# EAGLE board kbang_new (EAGLE 5.10)
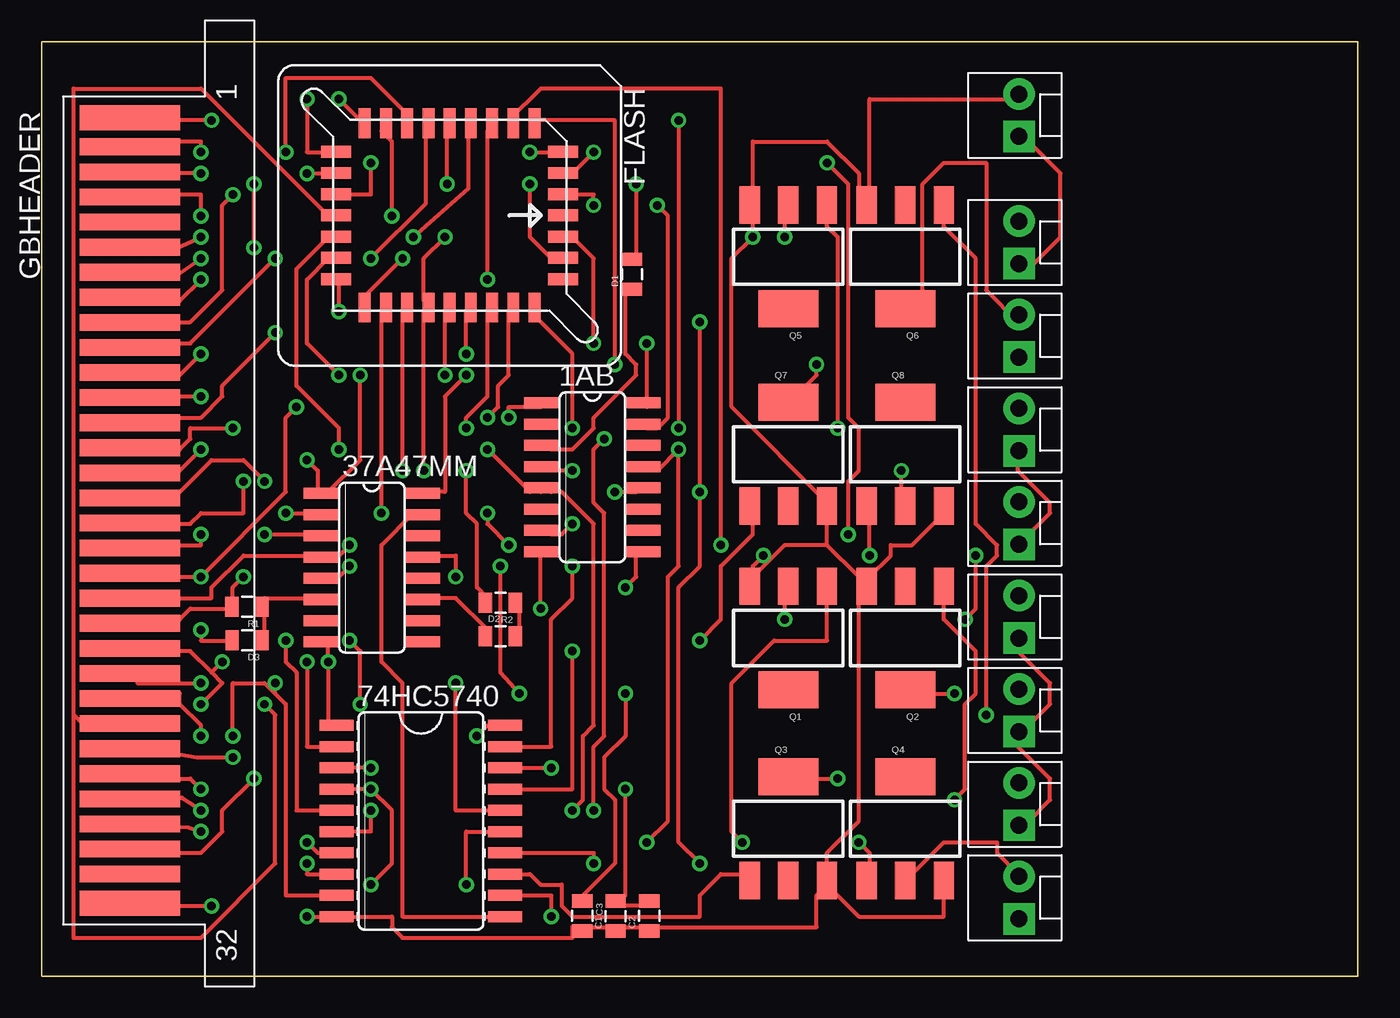
[diagram p0: board, top side]
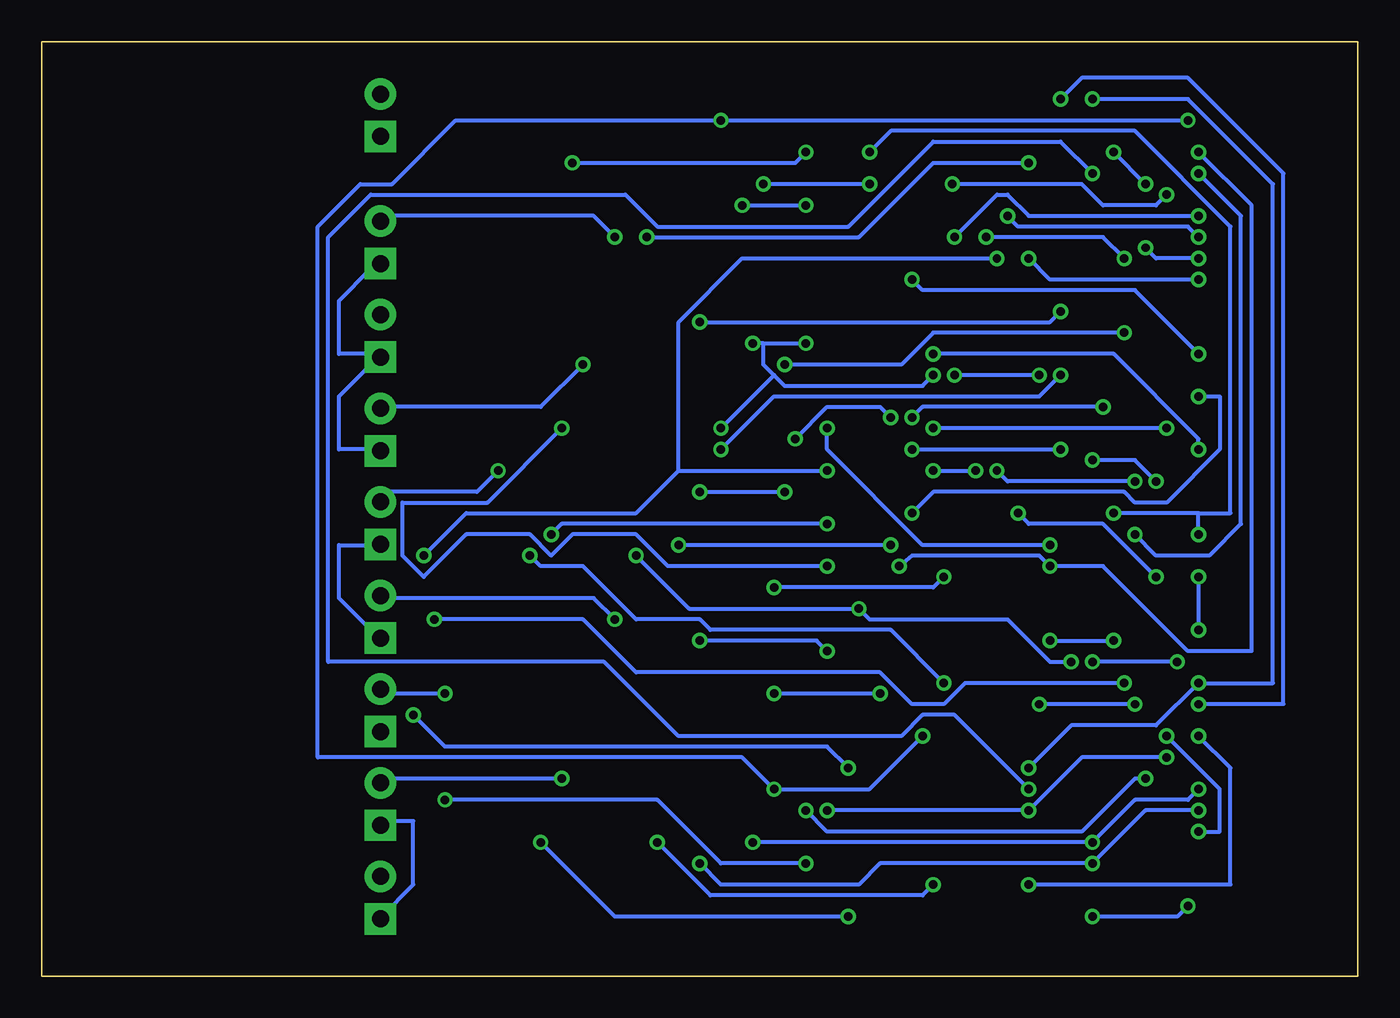
[diagram p1: board, bottom side, seen from below]

Size 78.74 x 55.88 mm. Coordinates in mm from the lower left corner, seen from the top.
Copper layers (1*16): Top 0.035mm / dielectric 1.5mm / Bottom 0.035mm
Design rules "8mils": minimum track width 8mil, minimum drill 0.6mm, track to track 8mil, track to pad 8mil, pad to pad 8mil, via to via 8mil, smd to smd 8mil, copper to edge 40mil, drill to drill 10mil, minimum pad ring 10mil, minimum via ring 8mil, stop-mask expansion 0mil, vias tented up to drill 0mil, thermal gap 10mil

## Footprints (pad centres in the part's own frame; a part is rotated, then mirrored left to right if it is on the bottom)
SO16 = smd 0.66 x 2.032: 1 -4.445,-3.073; 2 -3.175,-3.073; 3 -1.905,-3.073; 4 -0.635,-3.073; 5 0.635,-3.073; 6 1.905,-3.073; 7 3.175,-3.073; 8 4.445,-3.073; 9 4.445,3.073; 10 3.175,3.073; 11 1.905,3.073; 12 0.635,3.073; 13 -0.635,3.073; 14 -1.905,3.073; 15 -3.175,3.073; 16 -4.445,3.073
SO20W = smd 0.66 x 2.032: 1 -5.715,-5.029; 2 -4.445,-5.029; 3 -3.175,-5.029; 4 -1.905,-5.029; 5 -0.635,-5.029; 6 0.635,-5.029; 7 1.905,-5.029; 8 3.175,-5.029; 9 4.445,-5.029; 10 5.715,-5.029; 11 5.715,5.029; 12 4.445,5.029; 13 3.175,5.029; 14 1.905,5.029; 15 0.635,5.029; 16 -0.635,5.029; 17 -1.905,5.029; 18 -3.175,5.029; 19 -4.445,5.029; 20 -5.715,5.029
0805 = smd 0.8 x 1.2: 1 -0.9,0; 2 0.9,0
MOLEX-1X2 = drill 1.016 pad 1.88 square: 1 0,0 | drill 1.016 pad 1.88 round: 2 2.54,0
PLCC-32-SMT-TT = smd 0.71 x 1.78: 1 0,6.785; 2 -1.27,6.785; 3 -2.54,6.785; 4 -3.81,6.785; 14 -3.81,-6.785; 15 -2.54,-6.785; 16 -1.27,-6.785; 17 0,-6.785; 18 1.27,-6.785; 19 2.54,-6.785; 20 3.81,-6.785; 30 3.81,6.785; 31 2.54,6.785; 32 1.27,6.785 | smd 1.78 x 0.71: 5 -5.515,5.08; 6 -5.515,3.81; 7 -5.515,2.54; 8 -5.515,1.27; 9 -5.515,0; 10 -5.515,-1.27; 11 -5.515,-2.54; 12 -5.515,-3.81; 13 -5.515,-5.08; 21 5.515,-5.08; 22 5.515,-3.81; 23 5.515,-2.54; 24 5.515,-1.27; 25 5.515,0; 26 5.515,1.27; 27 5.515,2.54; 28 5.515,3.81; 29 5.515,5.08
GB_CON32 = smd 1.5 x 6: 1 2,4; 32 49,4 | smd 1 x 6: 2 3.75,4; 3 5.25,4; 4 6.75,4; 5 8.25,4; 6 9.75,4; 7 11.25,4; 8 12.75,4; 9 14.25,4; 10 15.75,4; 11 17.25,4; 12 18.75,4; 13 20.25,4; 14 21.75,4; 15 23.25,4; 16 24.75,4; 17 26.25,4; 18 27.75,4; 19 29.25,4; 20 30.75,4; 21 32.25,4; 22 33.75,4; 23 35.25,4; 24 36.75,4; 25 38.25,4; 26 39.75,4; 27 41.25,4; 28 42.75,4; 29 44.25,4; 30 45.75,4; 31 47.25,4
SOT223 = smd 1.219 x 2.235: 1 -2.311,-3.099; 2 0,-3.099; 3 2.311,-3.099 | smd 3.6 x 2.2: 4 0,3.099

## Placement (x,y rotation side)
1AB  [SO16]  32.95,29.84 270 top
37A47MM  [SO16]  19.75,24.43 270 top
74HC5740  [SO20W]  22.68,9.27 270 top
C1  104  [0805]  34.34,3.59 90 top
C2  104  [0805]  36.35,3.6 90 top
C3  104  [0805]  32.34,3.6 270 top
D1  48  [0805]  35.33,41.98 90 top
D2  PH  [0805]  27.44,20.34 0 top
D3  50  [0805]  12.29,20.1 180 top
E$1  [MOLEX-1X2]  58.47,42.62 90 top
E$2  [MOLEX-1X2]  58.47,37.02 90 top
E$3  [MOLEX-1X2]  58.47,31.42 90 top
E$4  [MOLEX-1X2]  58.47,25.82 90 top
E$5  [MOLEX-1X2]  58.47,20.22 90 top
E$14  [MOLEX-1X2]  58.47,14.62 90 top
E$15  [MOLEX-1X2]  58.47,9.02 90 top
E$16  [MOLEX-1X2]  58.47,3.42 90 top
E$17  [MOLEX-1X2]  58.47,50.22 90 top
FLASH  29c010  [PLCC-32-SMT-TT]  24.41,45.5 270 top
GBHEADER  [GB_CON32]  1.27,53.35 270 top
Q1  [SOT223]  44.67,20.22 180 top
Q2  [SOT223]  51.67,20.22 180 top
Q3  [SOT223]  44.67,8.82 0 top
Q4  [SOT223]  51.67,8.82 0 top
Q5  [SOT223]  44.67,43.02 180 top
Q6  [SOT223]  51.67,43.02 180 top
Q7  [SOT223]  44.67,31.22 0 top
Q8  [SOT223]  51.67,31.22 0 top
R1  1089  [0805]  12.28,22.1 180 top
R2  1089  [0805]  27.44,22.34 180 top

## Library data of the parts
1AB 74HC5740 = 40xx
37A47MM = 74ac-logic
C1-C3 D1-D3 E$1-E$5 E$14-E$17 Q1-Q8 R1 R2 = SparkFun
FLASH = smd-special
GBHEADER = GAMEBOY

## Nets
N$5: E$1.2 Q5.2
S$2: 37A47MM.11 D2.1
S$3: E$15.2 Q3.4
S$4: 74HC5740.13 Q3.1
S$5: E$5.2 Q1.2
S$6: E$14.2 Q2.4
S$7: D1.2 FLASH.31
S$8: E$2.2 Q6.4
S$9: E$4.2 Q8.2
S$10: E$16.2 Q4.2
S$11: 1AB.15 FLASH.2
S$12: 74HC5740.12 Q4.1
S$13: E$3.2 Q7.4
S$14: 1AB.16 37A47MM.16 74HC5740.20 C1.2 C2.2 FLASH.32 GBHEADER.1
S$15: E$1.1 E$2.1 E$3.1 E$4.1 E$5.1 E$14.1 E$15.1 E$16.1 E$17.1
S$16: 74HC5740.14 Q2.1
S$17: 1AB.7 FLASH.3
S$18: 74HC5740.16 Q8.1
S$19: 37A47MM.5 C3.1 GBHEADER.2
S$20: 37A47MM.3 GBHEADER.3
S$21: FLASH.9 GBHEADER.9
S$22: 74HC5740.19 Q5.1
S$23: 74HC5740.15 Q1.1
S$24: 74HC5740.18 Q6.1
S$25: 74HC5740.17 Q7.1
S$26: FLASH.24 GBHEADER.4 R2.2
S$27: FLASH.12 GBHEADER.6
S$28: FLASH.11 GBHEADER.7
S$29: FLASH.10 GBHEADER.8
S$30: FLASH.8 GBHEADER.10
S$31: FLASH.7 GBHEADER.11
S$32: FLASH.6 GBHEADER.12
S$33: 37A47MM.6 D3.1 R1.1
S$34: FLASH.5 GBHEADER.13
S$35: 1AB.12 74HC5740.8 FLASH.20 GBHEADER.28
S$36: FLASH.27 GBHEADER.14
S$37: FLASH.26 GBHEADER.15
S$38: FLASH.23 GBHEADER.16
S$39: 37A47MM.1 FLASH.25 GBHEADER.17
S$40: 37A47MM.2 FLASH.4 GBHEADER.18
S$41: 37A47MM.14
S$42: 1AB.9 37A47MM.13
S$43: D3.2 FLASH.28 GBHEADER.19
S$44: 37A47MM.4 FLASH.29 GBHEADER.20
S$45: FLASH.22 GBHEADER.21 R1.2
S$46: 74HC5740.2 FLASH.13 GBHEADER.22
S$47: 74HC5740.3 FLASH.14 GBHEADER.23
S$48: 74HC5740.4 FLASH.15 GBHEADER.24
S$49: 74HC5740.5 FLASH.17 GBHEADER.25
S$50: 1AB.5 74HC5740.6 FLASH.18 GBHEADER.26
S$51: 1AB.13 74HC5740.7 FLASH.19 GBHEADER.27
S$52: 1AB.4 74HC5740.9 FLASH.21 GBHEADER.29
S$53: 1AB.1 GBHEADER.30
S$54: 1AB.8 37A47MM.8 74HC5740.1 74HC5740.10 C1.1 C2.1 C3.2 E$17.2 FLASH.16 GBHEADER.32 Q1.3 Q2.3 Q3.3 Q4.3 Q5.3 Q6.3 Q7.3 Q8.3
S$55: 1AB.3 D1.1
S$56: 1AB.11
S$57: D2.2 R2.1
S$59: 37A47MM.15 74HC5740.11

## Tracks (layer width: path | path; a pad name or v marks a point on that pad's centre or on a via)
N$5  (via drill 0.51)
  Top 0.254: v44.45,44.2 44.45,46.1 Q5.2
  Bottom 0.254: v44.45,44.2 45.72,45.47 58.42,45.47 E$1.2
S$2
  Top 0.254: D2.1 26.67,20.7 24.77,22.61 22.86,22.61 37A47MM.11
S$3  (via drill 0.51)
  Top 0.254: v47.62,11.81 45.09,11.81 Q3.4
  Bottom 0.254: v47.62,11.81 58.42,11.81 E$15.2
S$4
  Top 0.254: 74HC5740.13 29.21,6.1 29.84,5.46 31.11,5.46 31.11,4.19 31.75,3.56 39.37,3.56 39.37,4.83 40.64,6.1 41.91,6.1 Q3.1
S$5  (via drill 0.51)
  Top 0.254: v44.45,21.34 44.45,23.24 Q1.2
  Top 0.61: Q1.2 44.77,23.42 44.87,23.42 | 44.87,23.42 44.87,23.82 | 44.87,23.42 44.87,23.02
  Bottom 0.254: v44.45,21.34 45.72,22.61 58.42,22.61 E$5.2
S$6  (via drill 0.51)
  Top 0.254: v54.61,16.89 52.07,16.89 Q2.4
  Bottom 0.254: v54.61,16.89 58.42,16.89 E$14.2
S$7  (via drill 0.51)
  Top 0.254: v35.56,47.37 35.56,42.93 D1.2 | v29.21,47.37 29.21,44.2 30.48,42.93 31.11,42.93 FLASH.31
  Bottom 0.254: v29.21,47.37 v35.56,47.37
S$8
  Top 0.254: Q6.4 52.07,40.39 52.7,41.02 52.7,47.37 53.98,48.64 56.52,48.64 56.52,41.02 58.42,39.12 E$2.2
S$9  (via drill 0.51)
  Top 0.254: v51.44,30.23 51.44,28.32 Q8.2
  Bottom 0.254: v51.44,30.23 52.7,28.96 58.42,28.96 E$4.2
S$10
  Top 0.254: Q4.2 52.07,6.1 53.98,8 57.15,8 57.15,7.37 58.42,6.1 E$16.2
S$11  (via drill 0.51)
  Top 0.254: v33.02,46.1 33.02,46.74 31.75,46.74 FLASH.2 | v36.83,46.1 37.47,45.47 37.47,33.4 36.83,32.77 36.2,32.77 1AB.15
  Bottom 0.254: v36.83,46.1 v33.02,46.1
S$12  (via drill 0.51)
  Top 0.254: v30.48,3.56 30.48,4.83 74HC5740.12 | v48.9,8 49.53,7.37 49.53,6.1 Q4.1
  Bottom 0.254: v30.48,3.56 44.45,3.56 v48.9,8
S$13  (via drill 0.51)
  Top 0.254: v46.35,36.58 46.35,35.94 45.09,34.67 Q7.4
  Bottom 0.254: v46.35,36.58 48.9,34.04 58.42,34.04 E$3.2
S$14  (via drill 0.51)
  Top 0.254: v33.02,37.85 33.02,42.93 31.75,44.2 FLASH.32 | v36.2,37.85 36.2,34.04 1AB.16 | v25.4,35.94 24.13,34.67 24.13,28.96 22.86,28.96 37A47MM.16 | C2.2 36.2,4.19 34.92,4.19 C1.2 34.92,4.83 v34.92,11.18 | v26.04,14.35 26.67,14.99 74HC5740.20 | v10.16,51.18 5.71,51.18 GBHEADER.1 | v38.1,51.18 v38.1,32.77
  Bottom 0.254: 35.56,37.85 v36.2,37.85 | 35.56,37.85 v33.02,37.85 | v25.4,35.94 26.04,35.31 34.29,35.31 34.92,35.94 | 34.92,35.94 35.56,36.58 35.56,37.85 | v26.04,14.35 29.21,11.18 v34.92,11.18 36.83,13.08 62.23,13.08 62.23,44.83 59.69,47.37 57.78,47.37 53.98,51.18 v38.1,51.18 v10.16,51.18 | v38.1,32.77 34.92,35.94
S$15
  Top 0.254: E$5.1 58.42,20.07 58.42,19.43 60.33,17.53 60.33,16.26 59.05,14.99 E$14.1 58.42,14.35 58.42,13.72 60.33,11.81 60.33,10.54 59.05,9.27 E$15.1 | E$4.1 59.05,26.42 60.33,27.69 60.33,28.32 58.42,30.23 58.42,30.86 E$3.1 | E$17.1 59.05,49.91 60.96,48.01 60.96,44.2 59.05,42.29 E$1.1
  Bottom 0.254: E$16.1 58.42,3.56 56.52,5.46 56.52,9.27 58.42,9.27 E$15.1 | E$3.1 59.05,31.5 60.96,31.5 60.96,34.67 59.05,36.58 E$2.1 59.05,37.21 60.96,37.21 60.96,40.39 59.05,42.29 E$1.1 | E$5.1 59.05,20.7 60.96,22.61 60.96,25.78 59.05,25.78 E$4.1
S$16  (via drill 0.51)
  Top 0.254: v33.02,6.73 33.02,7.37 74HC5740.14 | v54.61,10.54 55.24,11.18 55.24,16.26 55.88,16.89 55.88,19.43 53.98,21.34 53.98,23.24 Q2.1
  Bottom 0.254: v33.02,6.73 38.1,6.73 41.91,10.54 v54.61,10.54
S$17  (via drill 0.51)
  Top 0.254: v33.02,49.28 31.75,48.01 FLASH.3 | v46.99,48.64 48.26,47.37 48.26,33.4 48.9,32.77 48.9,30.23 48.26,29.59 v48.26,26.42 | v31.75,27.05 31.11,26.42 30.48,26.42 1AB.7
  Bottom 0.254: v33.02,49.28 33.66,48.64 v46.99,48.64 | v48.26,26.42 47.62,27.05 v31.75,27.05
S$18  (via drill 0.51)
  Top 0.254: v24.77,17.53 24.77,9.91 74HC5740.16 | v49.53,25.15 49.53,27.69 Q8.1
  Bottom 0.254: v24.77,17.53 27.94,20.7 38.73,20.7 39.37,21.34 43.18,21.34 46.35,24.51 48.9,24.51 v49.53,25.15
S$19  (via drill 0.51)
  Top 0.254: v34.92,16.89 34.92,14.35 33.66,13.08 33.66,11.18 34.29,10.54 34.29,6.73 32.38,4.83 C3.1 | v28.57,16.89 27.43,18.16 v27.43,24.51 | v18.41,24.51 17.78,23.88 17.14,23.88 37A47MM.5 | v9.53,49.28 9.53,49.91 5.71,49.91 GBHEADER.2
  Bottom 0.254: v28.57,16.89 v34.92,16.89 | v27.43,24.51 26.67,25.15 19.05,25.15 v18.41,24.51 15.24,24.51 10.16,19.43 6.35,19.43 6.35,46.1 v9.53,49.28
S$20  (via drill 0.51)
  Top 0.254: v13.34,26.42 16.51,26.42 37A47MM.3 | v9.53,48.01 5.71,48.01 GBHEADER.3
  Bottom 0.254: v13.34,26.42 12.06,25.15 8.89,25.15 6.99,27.05 6.99,45.47 v9.53,48.01
S$21  (via drill 0.51)
  Top 0.254: v24.26,47.37 24.26,50.55 FLASH.9 | v11.43,46.74 10.79,46.1 10.79,41.02 8.89,39.12 5.71,39.12 GBHEADER.9
  Bottom 0.254: v24.26,47.37 16.51,47.37 15.24,46.1 12.06,46.1 v11.43,46.74
S$22  (via drill 0.51)
  Top 0.254: v31.75,24.51 31.75,22.61 30.48,21.34 30.48,13.72 74HC5740.19 | v47.62,32.77 47.62,44.2 46.99,44.83 Q5.1
  Bottom 0.254: v31.75,24.51 41.27,24.51 43.18,26.42 46.99,26.42 48.26,25.15 49.53,26.42 53.34,26.42 55.88,23.88 57.15,25.15 57.15,28.32 52.07,28.32 v47.62,32.77
S$23  (via drill 0.51)
  Top 0.254: v25.4,5.46 25.4,8.64 74HC5740.15 | v41.91,8 41.27,8.64 41.27,17.53 43.81,20.07 46.99,20.07 46.99,23.24 Q1.1
  Bottom 0.254: v25.4,5.46 26.04,4.83 38.73,4.83 v41.91,8
S$24  (via drill 0.51)
  Top 0.254: v56.52,15.62 56.52,24.51 57.15,25.15 57.15,25.78 55.88,27.05 55.88,42.93 53.98,44.83 Q6.1 | 74HC5740.18 v30.48,12.45
  Bottom 0.254: v30.48,12.45 31.75,13.72 54.61,13.72 v56.52,15.62
S$25  (via drill 0.51)
  Top 0.254: v31.75,19.43 31.75,11.18 74HC5740.17 | v39.37,20.07 40.64,21.34 40.64,24.51 42.55,26.42 42.55,27.69 Q7.1
  Bottom 0.254: v31.75,19.43 32.38,20.07 v39.37,20.07
S$26  (via drill 0.51)
  Top 0.254: v25.4,30.23 25.4,27.69 26.04,27.05 26.04,23.24 26.67,22.61 R2.2 | v22.86,30.23 22.86,39.75 FLASH.24 22.86,40.39 22.86,42.93 v24.13,44.2 | v9.53,45.47 9.53,46.74 5.71,46.74 GBHEADER.4
  Bottom 0.254: v25.4,30.23 v22.86,30.23 | v9.53,45.47 19.68,45.47 20.95,46.74 21.59,46.74 v24.13,44.2
S$27  (via drill 0.51)
  Top 0.254: v20.95,45.47 20.95,49.91 20.32,50.55 FLASH.12 | v9.53,44.2 8.13,43.56 5.71,43.56 GBHEADER.6
  Bottom 0.254: v20.95,45.47 20.32,44.83 10.16,44.83 v9.53,44.2
S$28  (via drill 0.51)
  Top 0.254: v14.61,49.28 14.61,53.72 19.68,53.72 21.59,51.82 21.59,51.18 FLASH.11 | v12.7,43.56 v12.7,47.37 | v9.53,42.93 8.26,42.04 5.71,42.04 GBHEADER.7
  Bottom 0.254: v12.7,47.37 v14.61,49.28 | v12.7,43.56 12.06,42.93 v9.53,42.93
S$29  (via drill 0.51)
  Top 0.254: v19.68,42.93 22.99,46.23 22.99,50.67 FLASH.10 | v9.53,41.66 8.26,40.39 5.71,40.39 GBHEADER.8
  Bottom 0.254: v19.68,42.93 18.41,41.66 v9.53,41.66
S$30  (via drill 0.51)
  Top 0.254: v22.23,44.2 25.53,47.12 25.53,50.29 FLASH.8 | v13.97,42.93 8.89,37.85 5.71,37.85 GBHEADER.10
  Bottom 0.254: v22.23,44.2 15.24,44.2 v13.97,42.93
S$31  (via drill 0.51)
  Top 0.254: v26.67,41.66 26.67,50.55 FLASH.7 | v9.53,37.21 8.26,35.94 5.71,35.94 GBHEADER.11
  Bottom 0.254: v26.67,41.66 26.04,41.02 13.34,41.02 v9.53,37.21
S$32  (via drill 0.51)
  Top 0.254: v40.64,25.78 40.64,53.09 29.84,53.09 27.94,51.18 FLASH.6 | v27.94,25.78 26.67,27.05 v26.67,27.69 | v9.53,34.67 5.71,34.67 GBHEADER.12
  Bottom 0.254: v27.94,25.78 v40.64,25.78 | v26.67,27.69 25.4,28.96 13.97,28.96 13.34,28.32 11.43,28.32 8.26,31.5 8.26,34.67 v9.53,34.67
S$33
  Top 0.254: D3.1 13.34,20.07 13.34,21.97 R1.1 13.34,22.61 16.51,22.61 37A47MM.6
S$34  (via drill 0.51)
  Top 0.254: v34.29,36.58 34.29,51.18 29.21,51.18 FLASH.5 | v13.97,38.48 10.79,35.31 10.79,34.67 9.53,33.4 5.71,33.4 GBHEADER.13
  Bottom 0.254: v34.29,36.58 27.3,36.58 25.4,38.48 v13.97,38.48
S$35  (via drill 0.51)
  Top 0.254: v15.88,6.73 15.88,6.1 74HC5740.8 | v9.53,9.91 8.38,10.67 5.84,10.67 5.71,10.54 GBHEADER.28 | v17.78,39.75 17.78,41.66 FLASH.20 | v39.37,39.12 v39.37,28.96 39.37,24.51 38.1,23.24 38.1,8 v39.37,6.73 | v34.29,28.96 35.56,28.96 1AB.12
  Bottom 0.254: v9.53,9.91 12.7,9.91 v15.88,6.73 28.57,6.73 29.84,5.46 38.1,5.46 v39.37,6.73 | v17.78,39.75 18.41,39.12 v39.37,39.12 | v39.37,28.96 v34.29,28.96
S$36  (via drill 0.51)
  Top 0.254: v25.4,32.77 25.4,33.4 26.67,34.67 26.67,39.75 FLASH.27 | v11.43,32.77 8.89,32.77 8.89,32.13 8.26,31.5 5.71,31.5 GBHEADER.14
  Bottom 0.254: v11.43,32.77 v25.4,32.77
S$37  (via drill 0.51)
  Top 0.254: v25.4,37.21 25.4,39.75 FLASH.26 | v9.53,31.5 8.26,30.23 5.71,30.23 GBHEADER.15
  Bottom 0.254: v25.4,37.21 14.61,37.21 9.53,32.13 v9.53,31.5
S$38  (via drill 0.51)
  Top 0.254: v21.59,30.23 21.59,39.75 FLASH.23 | v13.34,29.59 12.06,30.86 10.16,30.86 7.62,28.32 5.71,28.32 GBHEADER.16
  Bottom 0.254: v21.59,30.23 20.95,29.59 v13.34,29.59
S$39  (via drill 0.51)
  Top 0.254: v24.13,35.94 24.13,39.75 FLASH.25 | v19.05,35.94 19.05,30.86 17.14,28.96 37A47MM.1 16.51,28.96 16.51,30.23 v15.88,30.86 | v12.06,29.59 12.06,27.69 9.53,27.69 8.89,27.05 5.71,27.05 GBHEADER.17
  Bottom 0.254: v19.05,35.94 v24.13,35.94 | v12.06,29.59 13.34,30.86 v15.88,30.86
S$40  (via drill 0.51)
  Top 0.254: v29.21,49.28 31.11,49.28 FLASH.4 | v14.61,27.69 16.51,27.69 37A47MM.2 | v9.53,26.42 9.53,25.78 5.71,25.78 GBHEADER.18
  Bottom 0.254: v29.21,49.28 27.94,50.55 13.34,50.55 7.62,44.83 7.62,27.69 9.53,27.69 | 9.53,27.69 v14.61,27.69 | v9.53,26.42 9.53,27.69
S$42  (via drill 0.51)
  Top 0.254: v24.77,23.88 24.77,25.15 22.86,25.15 37A47MM.13 | v34.92,23.24 35.56,23.88 35.56,25.15 1AB.9
  Bottom 0.254: v24.77,23.88 25.4,23.24 v34.92,23.24
S$43  (via drill 0.51)
  Top 0.254: v9.53,20.7 9.53,20.07 11.43,20.07 D3.2 | GBHEADER.19 5.71,23.88 v9.53,23.88 14.61,28.96 14.61,33.4 v15.24,34.04 | v26.67,33.4 27.3,34.04 27.3,35.31 27.94,35.94 27.94,39.75 FLASH.28
  Bottom 0.254: v9.53,23.88 v9.53,20.7 | v26.67,33.4 26.04,34.04 v15.24,34.04
S$44  (via drill 0.51)
  Top 0.254: v31.75,32.77 31.75,37.21 29.21,39.75 FLASH.29 | v18.41,25.78 17.78,25.15 17.14,25.15 37A47MM.4 16.51,25.15 12.06,25.15 10.16,23.24 10.16,22.61 5.71,22.61 GBHEADER.20
  Bottom 0.254: v31.75,32.77 31.75,31.5 26.04,25.78 v18.41,25.78
S$45  (via drill 0.51)
  Top 0.254: GBHEADER.21 5.71,21.34 8.26,21.34 8.89,21.97 11.43,21.97 R1.2 11.43,22.61 11.43,23.24 v12.06,23.88 | v20.32,27.69 20.32,39.75 FLASH.22
  Bottom 0.254: v20.32,27.69 19.68,27.05 15.24,27.05 v12.06,23.88
S$46  (via drill 0.51)
  Top 0.254: v17.78,52.45 19.05,51.18 FLASH.13 | v9.53,16.26 10.79,17.53 10.16,18.16 | 10.16,18.16 8.89,19.43 5.71,19.43 GBHEADER.22 | v15.88,18.8 15.88,13.72 74HC5740.2 | 10.16,18.16 v10.79,18.8
  Bottom 0.254: v17.78,52.45 16.51,53.72 10.16,53.72 4.45,48.01 4.45,16.26 v9.53,16.26 | v10.79,18.8 v15.88,18.8
S$47  (via drill 0.51)
  Top 0.254: v15.88,52.45 15.88,49.28 17.14,49.28 FLASH.14 | v9.53,17.53 5.71,17.53 5.71,18.16 GBHEADER.23 | v19.68,12.45 74HC5740.3
  Bottom 0.254: v15.88,52.45 10.16,52.45 5.08,47.37 5.08,17.53 v9.53,17.53 12.06,14.99 17.14,14.99 v19.68,12.45
S$48  (via drill 0.51)
  Top 0.254: v15.88,48.01 17.14,48.01 FLASH.15 | 74HC5740.4 v19.68,11.18 20.95,9.91 20.95,6.73 v19.68,5.46 | v9.53,14.35 9.53,14.99 8.26,16.26 8.26,16.89 5.71,16.89 GBHEADER.24
  Bottom 0.254: v15.88,48.01 17.78,49.91 25.4,49.91 30.48,44.83 41.91,44.83 43.81,46.74 59.05,46.74 61.59,44.2 61.59,18.8 45.09,18.8 40.64,14.35 27.3,14.35 26.04,15.62 24.13,15.62 v19.68,11.18 | v9.53,14.35 7.62,12.45 7.62,5.46 v19.68,5.46
S$49  (via drill 0.51)
  Top 0.254: 1.91,15.62 1.91,53.09 9.53,53.09 17.14,45.47 FLASH.17 | 1.91,15.62 2.54,14.99 5.08,14.99 GBHEADER.25 | v14.61,20.07 14.61,18.8 15.24,18.16 15.24,9.91 74HC5740.5 | v18.41,20.07 19.05,19.43 v19.05,16.26 | v13.34,16.26 13.97,15.62 13.97,6.73 9.53,2.29 1.91,2.29 1.91,15.62
  Bottom 0.254: v18.41,20.07 v14.61,20.07 | v13.34,16.26 v19.05,16.26
S$50  (via drill 0.51)
  Top 0.254: v19.68,9.91 19.68,8.64 74HC5740.6 | v11.43,13.08 9.27,13.08 5.71,13.72 GBHEADER.26 | v17.78,31.5 17.78,32.77 15.24,35.31 15.24,42.29 17.14,44.2 FLASH.18 | v26.67,31.5 29.21,28.96 29.84,28.96 1AB.5 30.48,28.96 31.11,28.96 33.02,27.05 33.02,14.99 32.38,14.35 32.38,10.54 v31.75,9.91
  Bottom 0.254: v11.43,13.08 16.51,13.08 v19.68,9.91 v31.75,9.91 | v26.67,31.5 v17.78,31.5
S$51  (via drill 0.51)
  Top 0.254: v15.88,8 16.51,7.37 74HC5740.7 | v9.53,11.18 8.89,11.81 5.71,11.81 GBHEADER.27 | v17.78,35.94 15.88,37.85 15.88,41.66 17.14,42.93 FLASH.19 | 1AB.13 36.2,30.23 36.83,30.23 v38.1,31.5 38.1,24.51 37.47,23.88 37.47,9.27 v36.2,8
  Bottom 0.254: v9.53,11.18 10.16,10.54 13.34,10.54 v15.88,8 v36.2,8 | v17.78,35.94 19.05,34.67 34.92,34.67 v38.1,31.5
S$52  (via drill 0.51)
  Top 0.254: 13.97,16.89 13.34,17.53 11.43,17.53 v11.43,14.35 | 13.97,16.89 14.61,16.26 14.61,4.83 74HC5740.9 | v9.53,8.64 8.76,8.89 GBHEADER.29 | v21.59,42.93 19.05,40.39 FLASH.21 | v31.75,30.23 30.48,30.23 1AB.4 | 13.97,16.89 v13.97,17.53 | v55.24,21.34 55.88,21.97 v55.88,25.15
  Bottom 0.254: v11.43,14.35 8.26,11.18 8.26,8.64 v9.53,8.64 | v21.59,42.93 36.83,42.93 40.64,39.12 40.64,30.23 | 40.64,30.23 v31.75,30.23 | v13.97,17.53 23.5,17.53 24.77,16.26 26.67,16.26 28.57,18.16 43.18,18.16 46.35,21.34 v55.24,21.34 | v55.88,25.15 53.34,27.69 43.18,27.69 40.64,30.23
S$53  (via drill 0.51)
  Top 0.254: v27.94,33.4 27.94,34.04 29.84,34.04 1AB.1 | v33.66,32.13 33.02,31.5 33.02,28.32 33.66,27.69 33.66,14.35 33.02,13.72 v33.02,9.91 | v12.7,11.81 10.79,9.91 10.79,8.64 9.53,7.37 5.71,7.37 GBHEADER.30
  Bottom 0.254: v27.94,33.4 28.57,34.04 31.75,34.04 v33.66,32.13 | v33.02,9.91 31.75,8.64 16.51,8.64 13.34,11.81 v12.7,11.81
S$54  (via drill 0.51)
  Top 0.254: v19.68,48.64 19.68,46.74 17.78,46.74 FLASH.16 | E$17.2 58.42,52.45 49.53,52.45 49.53,46.74 Q6.3 48.9,46.74 48.9,48.01 46.99,49.91 42.55,49.91 42.55,46.74 Q5.3 42.55,46.1 v42.55,44.2 41.27,42.93 41.27,34.04 46.99,28.32 Q7.3 46.99,27.69 46.99,25.78 | 74HC5740.1 17.14,14.99 v17.14,18.8 17.14,20.07 37A47MM.8 | v29.84,21.97 29.84,25.15 1AB.8 | 42.55,23.88 44.45,25.78 46.99,25.78 | 46.99,25.78 48.9,23.88 Q2.3 | Q8.3 53.98,27.69 52.07,25.78 50.8,25.78 50.8,25.15 49.53,23.88 Q2.3 | 46.99,5.46 48.9,3.56 53.98,3.56 53.98,5.46 Q4.3 | 46.99,5.46 46.35,4.83 46.35,2.92 36.83,2.92 C2.1 36.2,2.92 34.92,2.92 C1.1 34.29,2.92 32.38,2.92 C3.2 31.75,2.92 31.75,2.29 21.59,2.29 20.95,2.92 20.95,3.56 74HC5740.10 v15.88,3.56 | 46.99,5.46 Q3.3 46.99,6.1 46.99,7.37 48.9,9.27 48.9,23.24 Q2.3 | v10.16,4.19 5.71,4.19 GBHEADER.32 | v43.18,25.15 42.55,24.51 42.55,23.88 | 42.55,23.88 Q1.3
  Bottom 0.254: v19.68,48.64 25.4,48.64 29.84,44.2 v42.55,44.2 | v17.14,18.8 18.41,18.8 20.95,21.34 29.21,21.34 v29.84,21.97 40.01,21.97 v43.18,25.15 | v10.16,4.19 10.79,3.56 v15.88,3.56
S$55
  Top 0.254: D1.1 34.92,41.02 34.92,37.21 35.56,36.58 35.56,35.94 33.02,33.4 33.02,32.77 31.75,31.5 30.48,31.5 1AB.3
S$57
  Top 0.254: D2.2 28.57,20.7 28.57,21.97 R2.1
S$59
  Top 0.254: 74HC5740.11 21.59,3.56 21.59,17.53 20.32,18.8 20.32,25.78 22.23,27.69 37A47MM.15